# Altium PCB dogtag.PcbDoc
Units mm, origin at the board's own origin, x right, y up, seen from the top; angles counter-clockwise.
Board outline 61.34 x 25.4 mm, 2 copper layers (Top Layer, Bottom Layer); 5 components, 4 nets, 20 pads, 0 vias.
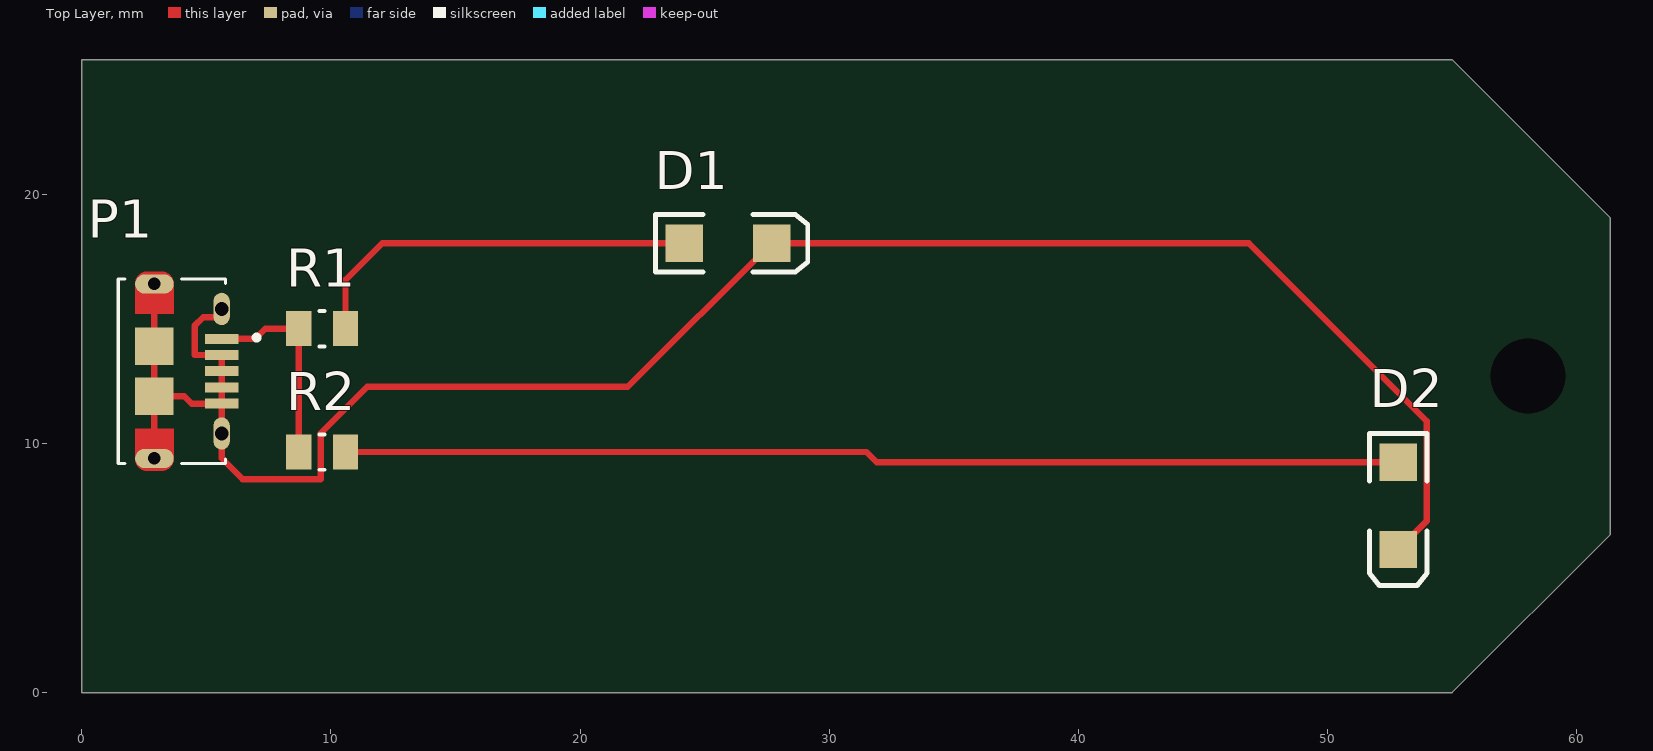
[diagram p0: Top Layer view]
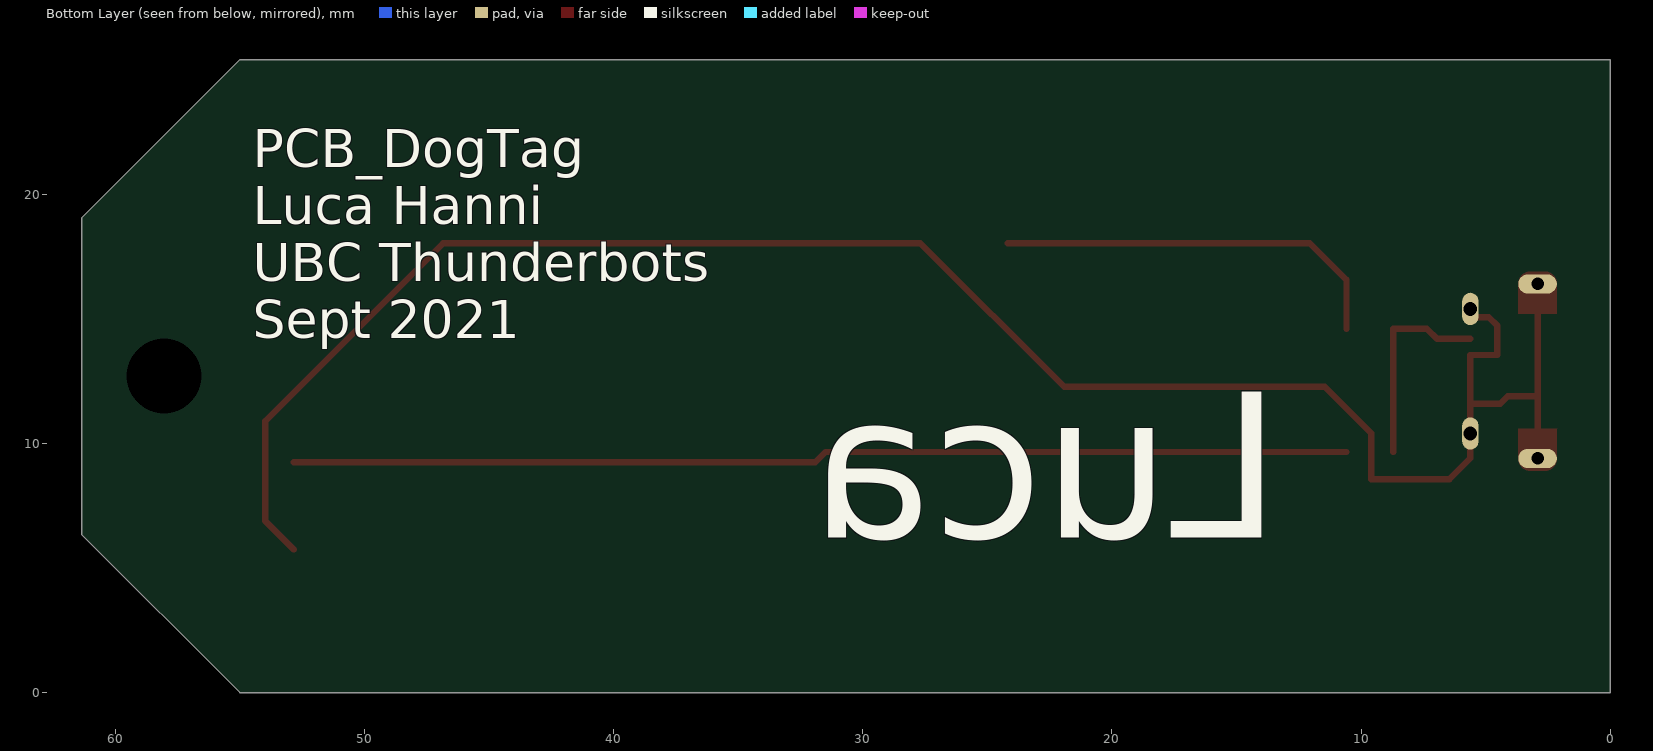
[diagram p1: Bottom Layer view, seen from below]

## Layer stack, top to bottom
Top Solder: solder mask 0.0102, Solder Resist, Dk 3.5
Top Layer: signal copper 0.0356
Dielectric 1: dielectric 0.32, FR-4, Dk 4.8
Bottom Layer: signal copper 0.0356
Bottom Solder: solder mask 0.0102, Solder Resist, Dk 3.5

## Board outline
54.991,25.4 61.341,19.05 61.341,6.35 54.991,0 0,0 0,25.4

## Design rules (kind name [scope] priority, off if disabled: settings)
Clearance [All] p1: gap=0.254 ignorepadtopadclearanceinfootprint=FALSE except(0: Arc-Hole Track-Hole SMDPad-Hole THPad-Hole Via-Hole Fill-Hole Poly-Hole Region-Hole Text-Hole)
PolygonConnect [All] p1: connectstyle=Relief reliefconductorwidth=0.254 reliefentries=4 polygonreliefangle="90 Angle" airgapwidth=0.254
RoomDefinition Schematic [InComponentClass('Schematic')] p1: confinementstyle=ConfineIn formatcopy=TRUE lockcomponents=FALSE outline -3.81,-2.159 66.04,-2.159 66.04,27.559 -3.81,27.559
RoutingVias [All] p1: holewidth=0.711 width=1.27 viastyle="Through Hole" minholewidth=0.711 minwidth=1.27 maxholewidth=0.711 maxwidth=1.27
SolderMaskExpansion [All] p1: expansion=0.102 istentingtop=FALSE
Width [All] p1: maxlimit=0.254 minlimit=0.254 preferedwidth=0.254
30 further rules are at their usual default settings.

## Components (designator, comment, footprint, x,y, rotation, side; value= is the part's Value field where it differs from the comment)
D1 "LED2" 3.2X1.6X1.1 25.936,18.034 r0 top
D2 "LED2" 3.2X1.6X1.1 52.832,7.493 r270 top
P1 "10118194-0001LF" "USB Micro B Receptacle" 2.931,12.897 r270 top
R1 "240" 0805 9.652,14.605 r180 top
R2 "240" 0805 9.652,9.652 r180 top

## Footprints (in the part's own frame and the unit in brackets; to place one, negate y for a bottom-side part, rotate by r counter-clockwise, add the part's x,y. Pads: shape width x height; smd on the part's side, far side on the other; paste and mask are expansions set on the pad)
3.2X1.6X1.1 [mm]
  rect 1.5x1.5 smd: 1(-1.75,0) 2(1.75,0)
  silkscreen extent -2.9,-1.15 3.2,1.15
0805 [mil]
  rect 40x55 smd: 1(-37,0) 2(37,0)
  silkscreen extent -4,-28 4,28, body extent -47,-28 47,28, height 24
"USB Micro B Receptacle" [mm] "CONN RCPT USB2.0 MICRO B SMD R/A"
  rect 0.4x1.35 smd: 1(-1.3,2.69) 2(-0.65,2.69) 3(0,2.69) 4(0.65,2.69) 5(1.3,2.69)
  oval 1.3x0.65 hole 0.55: S1(-2.5,2.69) S2(2.5,2.69)
  oval 0.775x1.55 hole 0.5: S3(-3.5,-0.01) S6(3.5,-0.01)
  rect 1.5x1.55 smd: S4(-1,-0.01) S5(1,-0.01)
  Top Layer region: 194 vertices and 0 holes, not listed, extent -4,-0.785 -2.3,0.77
  Top Layer region: 194 vertices and 0 holes, not listed, extent 2.3,-0.79 4,0.765
  silkscreen extent -3.7,-1.46 3.7,4.19, body extent -4,-2.74 4.04,2.79, height 2.87

## Part data
D1 D2: library part "LED RED SMD", "Typical RED, GREEN, YELLOW, AMBER GaAs LED", Color=Red, Current - Test=20mA, Lens Color=Colorless, Package=1206, Voltage - Forward (Vf) (Typ)=1.7V, Lens Transparency=Clear
P1: library part "USB Micro B Receptacle", "USB - micro B USB 2.0 Receptacle Connector 5 Position Surface Mount, Right Angle; Through Hole", Rating="100VAC 1.8A", ComponentLink1Description=Digikey, ComponentLink1URL=https://www.digikey.ca/product-detail/en/amphenol-icc-fci/10118194-0001LF/609-4618-1-ND/2785382, ComponentLink2Description=Datasheet, ComponentLink2URL=https://www.digikey.ca/en/datasheets/amphenol-fci/amphenol-fci-io-usb-micro, Digikey=609-4618-1-ND, Digikey Link=https://www.digikey.ca/product-detail/en/amphenol-icc-fci/10118194-0001LF/609-4618-1-ND/2785382, MF="Amphenol ICC (FCI)", MP=10118194-0001LF, Price="0.62000 CAD"
R1 R2: library part "RES 240.0 1/8W", "RES SMD 240 OHM 5% 1/8W 0805", Package=0805, Power (Watts)=0.125W, Tolerance=5%

## Free pads (board coordinates)
  round 1.524 hole 3: 1(58.039,12.7)

## Nets (pads, with @x,y where several pads share a name; then routed paths per layer and width w, separated by ;. In a path a pad name is that pad's centre, name@x,y a point inside that pad or via, vN(x,y) a via of type N, cw(c..) or ccw(c..) an arc to the next point about the centre after c; other vN are vias at no path point)
GND: D1.2 D2.2 P1.2 P1.3 P1.4 P1.5 P1.S1 P1.S2 P1.S3 P1.S4 P1.S5 P1.S6 | length 80.1
  Top Layer w0.254: P1.S6 P1.S5 ; P1.S3 P1.S4 P1.S5 ; P1.S1 5.621,15.062 4.877,15.062 4.547,14.732 4.547,13.547 P1.2 P1.3 P1.4 P1.5 ; D2.2 53.975,6.886 53.975,10.897 46.838,18.034 D1.2 21.92,12.268 11.455,12.268 9.601,10.414 9.601,8.56 6.459,8.56 5.621,9.398 P1.S2 P1.5 ; P1.S5 4.115,11.897 4.415,11.597 P1.5
NetD1_1: D1.1 R1.1 | length 16.2
  Top Layer w0.254: R1.1 10.592,16.561 12.065,18.034 D1.1
NetD2_1: D2.1 R2.1 | length 42.4
  Top Layer w0.254: R2.1 31.496,9.652 31.905,9.243 D2.1
NetP1_1: P1.1 R1.2 R2.2 | length 8.2
  Top Layer w0.254: P1.1 6.96,14.197 7.368,14.605 R1.2 R2.2

## Silkscreen, mask and mechanical layers (free items; w line width, h text height)
Bottom Overlay:
  text "PCB_DogTag / Luca Hanni / UBC Thunderbots / Sept 2021" at 54.483,14.224 h1.52
  text "Luca" at 13.208,6.223 h9

## Text inside footprints (layer, text, board x,y; h text height)
P1: Mechanical 13 "PCB END" at 0.571,14.847 h1.88 r270; Mechanical 13 "PCB END" at 0.571,14.847 h1.88 r270